# EAGLE board ruido_v1 (EAGLE 5.06)
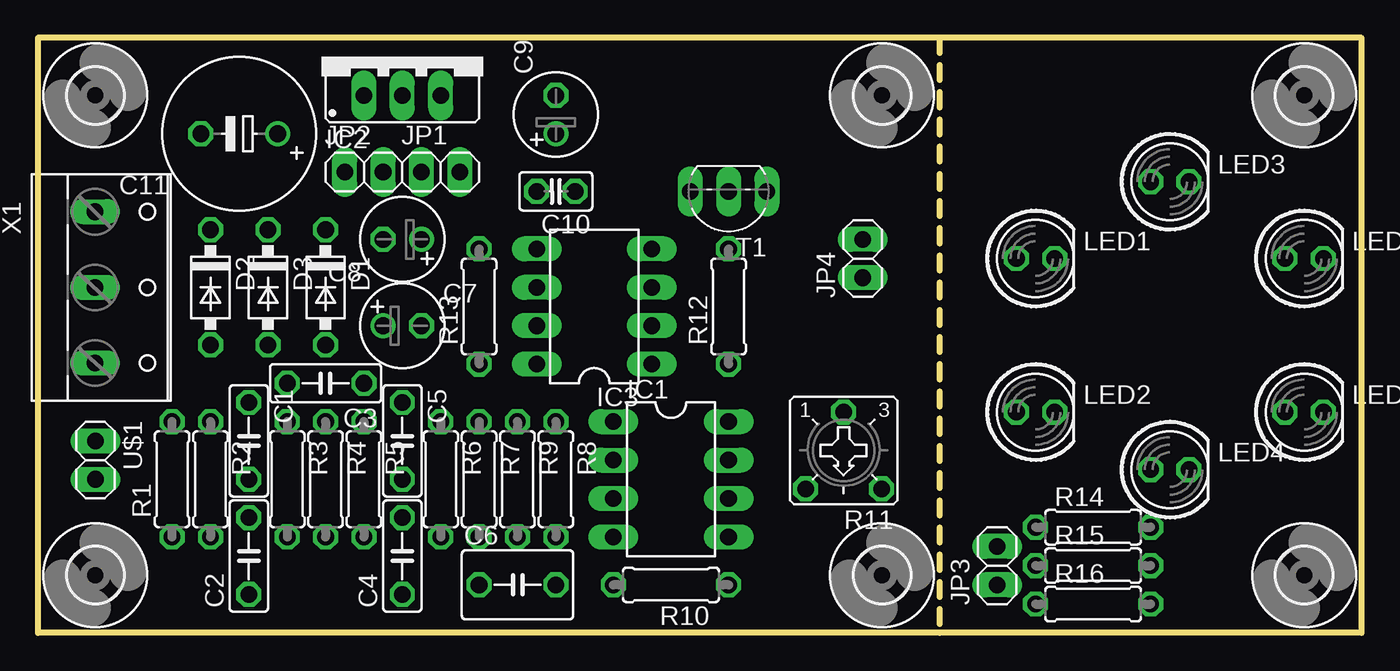
[diagram p0: board, top side]
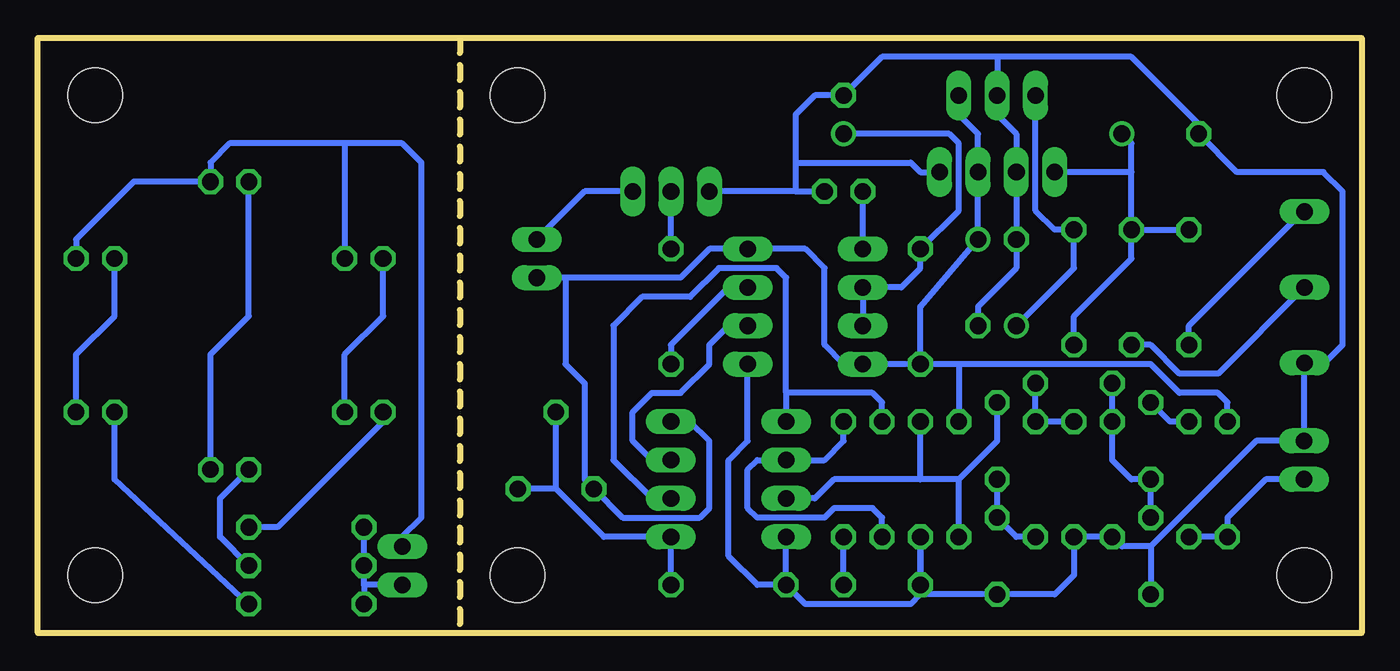
[diagram p1: board, bottom side, seen from below]

Size 87.63 x 39.37 mm. Coordinates in mm from the lower left corner, seen from the top.
Outline: 0,39.36 0,0 59.69,0
Outline: 59.69,39.37 59.69,0
Outline: 59.69,39.37 87.63,39.37 87.63,0 59.69,0
Outline: 59.69,39.37 0,39.37
Copper layers (1*16): Top 0.035mm / dielectric 1.5mm / Bottom 0.035mm
Design rules "default": minimum track width 10mil, minimum drill 24mil, track to track 8mil, track to pad 8mil, pad to pad 8mil, via to via 8mil, smd to smd 8mil, copper to edge 40mil, drill to drill 8mil, minimum pad ring 10mil, minimum via ring 8mil, stop-mask expansion 4mil, vias tented up to drill 0mil, thermal gap 10mil

## Footprints (pad centres in the part's own frame; a part is rotated, then mirrored left to right if it is on the bottom)
C050-025X075 = drill 1.1 octagon: 1 -2.54,0; 2 2.54,0
C050-045X075 = drill 1.1 octagon: 1 -2.54,0; 2 2.54,0
E2,5-6 = drill 1.1 round: + -1.27,0 | drill 1.1 pad 1.6 octagon: - 1.27,0
C025-025X050 = drill 1.1 octagon: 1 -1.27,0; 2 1.27,0
E5-10,5 = drill 1.1 round: + -2.54,0 | drill 1.1 octagon: - 2.54,0
DO41-7 = drill 1.1 octagon: A 3.81,0; C -3.81,0
DIL08 = drill 1.1 long: 1 -3.81,-3.81; 2 -1.27,-3.81; 3 1.27,-3.81; 4 3.81,-3.81; 5 3.81,3.81; 6 1.27,3.81; 7 -1.27,3.81; 8 -3.81,3.81
78XXS = drill 1.1 long: GND 0,-2.54; IN -2.54,-2.54; OUT 2.54,-2.54
DIL-08 = drill 1.1 long: 1 -3.81,-3.81; 2 -1.27,-3.81; 3 1.27,-3.81; 4 3.81,-3.81; 5 3.81,3.81; 6 1.27,3.81; 7 -1.27,3.81; 8 -3.81,3.81
1X02 = drill 1.1 long: 1 -1.27,0; 2 1.27,0
LED5MM = drill 1.1 octagon: A -1.27,0; K 1.27,0
0207/7 = drill 1.1 octagon: 1 -3.81,0; 2 3.81,0
CT6 = drill 1.1 octagon: A 2.515,2.54; E -2.515,2.54; S 0,-2.54
TO92- = drill 1.1 long: 1 2.54,0; 2 0,0; 3 -2.54,0
3,6 = hole 3.6: 0,0
W237-103 = drill 1.1 long: 1 -5,-1.29; 2 0,-1.29; 3 5,-1.29

## Placement (x,y rotation side)
C1  220nF  [C050-025X075]  13.97,12.7 270 top
C2  27nF  [C050-025X075]  13.97,5.08 90 top
C3  330nF  [C050-025X075]  19.05,16.51 180 top
C4  1.8nF  [C050-025X075]  24.13,5.08 90 top
C5  47nF  [C050-025X075]  24.13,12.7 270 top
C6  1uF  [C050-045X075]  31.75,3.17 0 top
C7  10uF  [E2,5-6]  24.13,20.32 0 top
C8  100uF  [E2,5-6]  24.13,26.04 180 top
C9  10uF  [E2,5-6]  34.29,34.29 90 top
C10  10nF  [C025-025X050]  34.29,29.21 180 top
C11  [E5-10,5]  13.34,33.02 180 top
D1  1N4004A  [DO41-7]  19.05,22.86 270 top
D2  1N4004  [DO41-7]  11.43,22.86 270 top
D3  1N4004  [DO41-7]  15.24,22.86 270 top
IC1  LM358N  [DIL08]  41.91,10.16 270 top
IC2  [78XXS]  24.13,38.1 0 top
IC3  NE555  [DIL-08]  36.83,21.59 90 top
JP1  [1X02]  26.67,30.48 0 top
JP2  [1X02]  21.59,30.48 0 top
JP3  [1X02]  63.5,4.45 90 top
JP4  [1X02]  54.61,24.77 90 top
LED1  [LED5MM]  66.04,24.77 0 top
LED2  [LED5MM]  66.04,14.61 0 top
LED3  [LED5MM]  74.93,29.84 0 top
LED4  [LED5MM]  74.93,10.79 0 top
LED5  [LED5MM]  83.82,24.77 0 top
LED6  [LED5MM]  83.82,14.61 0 top
R1  2k2  [0207/7]  8.89,10.16 90 top
R2  330  [0207/7]  11.43,10.16 270 top
R3  1k8  [0207/7]  16.51,10.16 270 top
R4  1k8  [0207/7]  19.05,10.16 270 top
R5  10k  [0207/7]  21.59,10.16 270 top
R6  100k  [0207/7]  26.67,10.16 270 top
R7  100k  [0207/7]  29.21,10.16 270 top
R8  1k  [0207/7]  34.29,10.16 270 top
R9  18k  [0207/7]  31.75,10.16 270 top
R10  10k  [0207/7]  41.91,3.17 180 top
R11  10k  [CT6]  53.34,12.06 180 top
R12  560  [0207/7]  45.72,21.59 90 top
R13  100k  [0207/7]  29.21,21.59 90 top
R14  470  [0207/7]  69.85,6.99 0 top
R15  470  [0207/7]  69.85,4.45 0 top
R16  470  [0207/7]  69.85,1.91 0 top
T1  BC547  [TO92-]  45.72,29.21 180 top
U$1  MIC  [1X02]  3.81,11.43 270 top
U$2  [3,6]  3.81,3.81 0 top
U$3  [3,6]  3.81,35.56 0 top
U$4  [3,6]  55.88,35.56 0 top
U$5  [3,6]  55.88,3.81 0 top
U$6  [3,6]  83.82,35.56 0 top
U$7  [3,6]  83.82,3.81 0 top
X1  [W237-103]  5.08,22.86 270 top

## Library data of the parts
C1-C11 D1-D3 IC1-IC3 JP1-JP4 LED1-LED6 R1-R16 T1 U$1-U$7 X1 = ruido

## Nets
+5V: C8.+ IC1.8 IC2.OUT IC3.4 IC3.8 JP1.1 JP4.1 R1.2 R6.1 R11.A R13.1
GND: C2.1 C4.1 C6.1 C7.- C8.- C9.- C10.1 C11.- IC1.4 IC2.GND IC3.1 JP1.2 JP2.2 R3.2 R4.2 R7.2 R10.2 T1.1 U$1.1 X1.3
N$1: R1.1 R2.2 U$1.2
N$2: C1.1 R2.1
N$3: C1.2 C2.2 C3.2 R3.1
N$4: R12.2 T1.2
N$5: IC1.7 IC3.2
N$6: C3.1 R4.1 R5.1
N$7: C4.2 C5.2 R5.2
N$8: C5.1 IC1.3 R6.2 R7.1
N$9: C6.2 R8.2
N$10: IC1.2 R8.1 R9.2
N$11: IC1.1 IC1.6 R9.1
N$12: IC1.5 R10.1 R11.E R11.S
N$13: JP3.1 R14.1 R15.1 R16.1
N$14: C7.+ D1.C IC2.IN
N$15: C9.+ IC3.6 IC3.7 R13.2
N$16: C10.2 IC3.5
N$17: C11.+ D1.A D2.C D3.C JP2.1
N$18: IC3.3 R12.1
N$19: LED1.A LED2.K
N$20: LED5.A LED6.K
N$21: LED3.A LED4.K
N$22: LED2.A R14.2
N$23: D2.A X1.1
N$24: D3.A X1.2
N$25: LED4.A R15.2
N$26: LED6.A R16.2
N$27: JP4.2 T1.3
N$28: JP3.2 LED1.K LED3.K LED5.K

## Tracks (layer width: path | path; a pad name or v marks a point on that pad's centre or on a via)
+5V
  Bottom 0.406: R13.1 IC3.8 34.29,17.78 35.56,19.05 35.56,24.13 36.83,25.4 IC3.4 43.18,25.4 45.09,23.5 52.7,23.5 | R13.1 29.21,21.59 C8.+ JP1.1 25.4,33.02 26.67,34.29 IC2.OUT | IC1.8 44.45,13.97 43.18,12.7 43.18,8.26 43.81,7.62 48.92,7.62 R11.A 50.83,9.55 51.44,10.16 51.44,16.51 52.7,17.78 52.7,23.5 | 26.67,17.78 13.97,17.78 12.06,15.88 9.53,15.88 8.89,15.24 R1.2 | 26.67,17.78 R13.1 | 26.67,17.78 R6.1 | 52.7,23.5 JP4.1
GND
  Bottom 0.406: C6.1 R7.2 29.21,2.54 | R10.2 40.01,3.17 41.91,5.08 41.91,11.43 40.64,12.7 IC3.1 | C7.- 25.4,21.59 22.86,24.13 C8.- JP2.2 22.86,33.02 24.13,34.29 | 3.81,17.78 3.81,17.84 X1.3 | 3.81,17.78 U$1.1 6.99,12.7 13.97,5.71 | 3.81,17.78 2.54,17.78 1.27,19.05 1.27,29.21 2.54,30.48 8.26,30.48 C11.- 10.79,33.66 15.24,38.1 24.13,38.1 | R10.2 IC1.4 | 24.13,34.29 IC2.GND 24.13,38.1 | JP1.2 29.21,30.48 29.84,31.11 37.47,31.11 | 13.97,5.71 C2.1 | 13.97,5.71 15.88,5.71 R3.2 R4.2 19.05,3.81 20.32,2.54 C4.1 29.21,2.54 | 29.21,2.54 29.84,1.91 36.83,1.91 R10.2 | 37.47,29.21 C10.1 | 37.47,29.21 T1.1 | 37.47,31.11 37.47,29.21 | 37.47,31.11 37.47,34.29 36.2,35.56 C9.- 31.75,38.1 24.13,38.1 | 24.13,38.1 24.13,34.29
N$1
  Bottom 0.406: U$1.2 6.35,10.16 8.89,7.62 R1.1 R2.2
N$2
  Bottom 0.406: R2.1 12.7,13.97 C1.1
N$3
  Bottom 0.406: C2.2 C1.2 15.24,10.16 16.51,11.43 R3.1 C3.2
N$4
  Bottom 0.406: 45.72,26.04 R12.2 T1.2
N$5
  Bottom 0.406: IC3.2 41.91,20.32 43.18,19.05 43.18,17.78 45.09,15.88 46.99,15.88 48.26,14.61 48.26,12.7 46.99,11.43 IC1.7
N$6
  Bottom 0.406: R4.1 R5.1 C3.1
N$7
  Bottom 0.406: R5.2 22.86,6.35 C4.2 C5.2
N$8
  Bottom 0.406: R6.2 26.67,10.16 | 26.67,10.16 29.21,10.16 | 29.21,10.16 R7.1 | 26.67,10.16 24.13,12.7 C5.1 | IC1.3 36.2,8.89 34.92,10.16 29.21,10.16
N$9
  Bottom 0.406: C6.2 R8.2
N$10
  Bottom 0.406: R8.1 34.29,12.7 35.56,11.43 IC1.2 40.01,11.43 40.64,10.79 40.64,8.26 40.01,7.62 35.56,7.62 34.92,8.26 32.38,8.26 31.75,7.62 R9.2
N$11
  Bottom 0.406: R9.1 31.75,15.24 32.38,15.88 38.1,15.88 | IC1.6 46.99,8.89 49.53,11.43 49.53,20.32 47.62,22.23 44.45,22.23 42.55,24.13 38.73,24.13 38.1,23.5 38.1,15.88 | 38.1,15.88 IC1.1
N$12
  Bottom 0.406: R10.1 IC1.5 50.16,6.35 53.34,9.53 | 53.34,9.53 R11.E | 53.34,9.53 R11.S
N$13
  Bottom 0.406: R14.1 R15.1 66.04,3.17 | JP3.1 66.04,3.17 | 66.04,3.17 R16.1
N$14
  Bottom 0.406: C7.+ 19.05,24.13 D1.C 20.32,26.67 21.59,27.94 IC2.IN
N$15
  Bottom 0.406: IC3.7 IC3.6 30.48,22.86 29.21,24.13 R13.2 26.67,27.94 26.67,32.38 27.3,33.02 C9.+
N$16
  Bottom 0.406: IC3.5 C10.2
N$17
  Bottom 0.406: D3.C D2.C | D1.A 19.05,20.95 15.24,24.77 D3.C | D3.C 15.24,30.48 | 15.24,30.48 15.24,32.38 C11.+ | 15.24,30.48 JP2.1
N$18
  Bottom 0.406: IC3.3 41.91,22.86 45.72,19.05 R12.1
N$19
  Bottom 0.406: LED2.K 67.31,18.41 64.77,20.95 LED1.A
N$20
  Bottom 0.406: LED6.K 85.09,18.41 82.55,20.95 LED5.A
N$21
  Bottom 0.406: LED4.K 76.2,18.41 73.66,20.95 LED3.A
N$22
  Bottom 0.406: LED2.A 64.77,13.97 71.75,6.99 R14.2
N$23
  Bottom 0.406: X1.1 3.89,27.86 11.43,20.32 D2.A
N$24
  Bottom 0.406: D3.A 13.97,19.05 12.06,17.14 9.51,17.14 X1.2
N$25
  Bottom 0.406: R15.2 75.56,6.35 75.56,8.89 LED4.A
N$26
  Bottom 0.406: R16.2 82.55,10.16 LED6.A
N$27
  Bottom 0.406: T1.3 51.44,29.21 JP4.2
N$28
  Bottom 0.406: LED5.K 85.09,26.04 81.28,29.84 LED3.K 76.2,31.11 74.93,32.38 67.31,32.38 | 67.31,32.38 LED1.K | JP3.2 63.5,6.35 62.23,7.62 62.23,31.11 63.5,32.38 67.31,32.38